# EAGLE board breakout (EAGLE 9.4.0)

Size 82.53 x 61.9 mm. Coordinates in mm from the lower left corner, seen from the top.
Outline: 0,0 82.53,0 82.53,61.9 0,61.9 0,0
Copper layers (1*16): Top 0.035mm / dielectric 1.5mm / Bottom 0.035mm
Design rules "default": minimum track width 6mil, minimum drill 0.35mm, track to track 6mil, track to pad 6mil, pad to pad 6mil, via to via 6mil, smd to smd 6mil, copper to edge 40mil, drill to drill 6mil, minimum pad ring 10mil, minimum via ring 8mil, stop-mask expansion 4mil, vias tented up to drill 0mil, thermal gap 10mil

## Footprints (pad centres in the part's own frame; a part is rotated, then mirrored left to right if it is on the bottom)
PANASONIC_D = smd 3 x 1.4: + 2.4,0; - -2.4,0
C0603 = smd 1.1 x 1: 1 -0.85,0; 2 0.85,0
PANASONIC_B = smd 2.2 x 1.4: + 1.6,0; - -1.6,0
WQP_PJ_301M6 = drill 1.016 pad 1.778 octagon: P1 0,-5.715; P2 0,-3.175; P3 0,4.445 | hole 2.2: 0,0
SOD123 = smd 1.4 x 1.4: A 1.9,0; C -1.9,0
SO14 = smd 0.6 x 2.2: 1 -3.81,-2.6; 2 -2.54,-2.6; 3 -1.27,-2.6; 4 0,-2.6; 5 1.27,-2.6; 6 2.54,-2.6; 7 3.81,-2.6; 8 3.81,2.6; 9 2.54,2.6; 10 1.27,2.6; 11 0,2.6; 12 -1.27,2.6; 13 -2.54,2.6; 14 -3.81,2.6
TO252 = smd 1 x 1.6: 1 -2.28,-4.8; 2 2.28,-4.8 | smd 5.4 x 6.2: 3 0,2.5
SO08 = smd 0.6 x 2.2: 1 -1.905,-2.6; 2 -0.635,-2.6; 3 0.635,-2.6; 4 1.905,-2.6; 5 1.905,2.6; 6 0.635,2.6; 7 -0.635,2.6; 8 -1.905,2.6
DBZ_R-PDSO-G3 = smd 0.7 x 1: 1 -0.95,-1.1; 2 0.95,-1.1; 3 0,1.1
AVR_ICSP = drill 1.016 pad 1.88 octagon: 1 -1.27,5.08; 2 1.27,5.08; 3 -1.27,2.54; 4 1.27,2.54; 5 -1.27,0; 6 1.27,0; 7 -1.27,-2.54; 8 1.27,-2.54; 9 -1.27,-5.08; 10 1.27,-5.08
SOT23-BEC = smd 1 x 1.4: B -0.95,-1.1; C 0,1.1; E 0.95,-1.1
R1206 = smd 1.6 x 1.803: 1 -1.422,0; 2 1.422,0
R0603 = smd 1 x 1.1: 1 -0.85,0; 2 0.85,0
BOURNS_PTV112 = drill 1 pad 1.6 octagon: 1 -3,-11; 1P -1,-11; 2 -5,-11; 2P 1,-11; 3 5,-11; 3P 3,-11 | drill 2.8 pad 3.81 octagon: P$1 5.8,0; P$5 -5.8,0
ALPS_POT_VERTICAL_PS = drill 1 pad 1.88 square: P$1 -2.5,7; P$2 0,7; P$3 2.5,7 | drill 1.5 pad 2.54 octagon: P$4 -4.7,0; P$5 4.7,0

## Placement (x,y rotation side)
C1  47u  [PANASONIC_D]  5.08,6.35 90 top
C2  47u  [PANASONIC_D]  13.97,24.13 270 top
C3  100n  [C0603]  11.43,30.48 0 top
C4  47u  [PANASONIC_D]  6.35,34.29 0 top
C10  1n  [C0603]  53.34,43.18 270 top
C13  47u  [PANASONIC_D]  27.94,6.35 270 top
C15  100n  [C0603]  78.74,35.56 0 top
C16  100n  [C0603]  38.1,20.32 180 top
C22  1n  [C0603]  66.04,41.91 270 top
C33  10u  [PANASONIC_B]  45.72,27.94 270 top
C36  10u  [PANASONIC_B]  -16.51,50.8 0 top  (outside the outline)
C37  10u  [PANASONIC_B]  5.08,41.91 180 top
C39  100n  [C0603]  30.48,33.02 0 top
C40  18p  [C0603]  43.18,34.29 270 top
C41  10u  [PANASONIC_B]  50.8,38.1 270 top
C42  18p  [C0603]  43.18,44.45 90 top
C43  220p  [C0603]  -16.51,41.91 0 top  (outside the outline)
C44  220p  [C0603]  11.43,40.64 0 top
C46  100n  [C0603]  36.83,33.02 0 top
CV_IN  PJ301_THONKICONN6  [WQP_PJ_301M6]  54.61,52.07 0 bottom
CV_IN_ATT  PJ301_THONKICONN6  [WQP_PJ_301M6]  64.77,52.07 0 bottom
D1  1N5819HW  [SOD123]  8.89,12.7 0 top
D2  1N5819HW  [SOD123]  25.4,12.7 0 top
IC1  OPAMP-TL074D  [SO14]  30.48,39.37 270 top
IC2  LM1117-3.3  [TO252]  6.35,24.13 0 top
IC3  MCP6002  [SO08]  59.69,41.91 90 top
IC6  LM4040B10  [DBZ_R-PDSO-G3]  38.1,24.13 0 top
IN_LEFT  PJ301_THONKICONN6  [WQP_PJ_301M6]  6.35,52.07 0 bottom
IN_RIGHT  PJ301_THONKICONN6  [WQP_PJ_301M6]  16.51,52.07 0 bottom
JP3  M05X2PTH  [AVR_ICSP]  16.51,6.35 90 top
OUT_LEFT  PJ301_THONKICONN6  [WQP_PJ_301M6]  40.64,52.07 0 bottom
OUT_RIGHT  PJ301_THONKICONN6  [WQP_PJ_301M6]  30.48,52.07 0 bottom
Q2  MMBT3904  [SOT23-BEC]  78.74,43.18 270 top
R11  4.7  [R1206]  11.43,16.51 180 top
R15  100k  [R0603]  78.74,48.26 270 top
R16  10k  [R0603]  78.74,39.37 180 top
R21  100k  [R0603]  50.8,52.07 90 top
R22  200k  [R0603]  48.26,44.45 270 top
R25  33k  [R0603]  50.8,44.45 90 top
R30  470  [R0603]  38.1,17.78 0 top
R31  66.5k  [R0603]  68.58,41.91 90 top
R32  100k  [R0603]  68.58,52.07 90 top
R33  200k  [R0603]  71.12,41.91 270 top
R42  PTV112-4420A-A503  [BOURNS_PTV112]  24.13,19.05 180 bottom
R43  10kB  [ALPS_POT_VERTICAL_PS]  66.04,20.32 0 top
R46  3.3k  [R0603]  19.05,43.18 90 top
R47  3.3k  [R0603]  24.13,41.91 90 top
R48  39k  [R0603]  45.72,44.45 270 top
R49  39k  [R0603]  45.72,34.29 90 top
R50  39k  [R0603]  45.72,39.37 270 top
R51  5.6k  [R0603]  48.26,34.29 270 top
R52  5.6k  [R0603]  43.18,39.37 270 top
R53  5.6k  [R0603]  -16.51,38.1 0 top  (outside the outline)
R54  5.6k  [R0603]  -16.51,33.02 0 top  (outside the outline)
R55  5.6k  [R0603]  11.43,38.1 0 top
R56  5.6k  [R0603]  11.43,43.18 180 top
R57  22k  [R0603]  19.05,46.99 90 top
R58  22k  [R0603]  22.86,52.07 90 top
R59  39k  [R0603]  50.8,31.75 90 top
R61  1.0k  [R0603]  45.72,52.07 270 top
R62  1.0k  [R0603]  36.83,46.99 270 top
TRG/GATE_IN  PJ301_THONKICONN6  [WQP_PJ_301M6]  74.93,52.07 0 bottom

## Library data of the parts
C1-C4 C10 C13 C15 C16 C22 C33 C36 C37 C39-C44 C46 R11 R15 R16 R21 R22 R25 R30-R33 R46-R59 R61 R62 = rcl
CV_IN CV_IN_ATT IN_LEFT IN_RIGHT OUT_LEFT OUT_RIGHT TRG/GATE_IN = og-pj301
D1 D2 = diode
IC1 = 0000-master
IC2 = og-vreg
IC3 = gm-ics
IC6 = texas
JP3 = og-header
Q2 = transistor
R42 R43 = og-pots

## Nets
+3V3: C3.1 C4.+ C15.1 IC2.3 IC3.8 R16.2
AREF_-10: C16.1 IC6.2 R22.2 R30.2 R43.P$3
DENSITY_CV: C22.2 IC3.1 R31.1
GND: C1.- C2.- C3.2 C4.- C13.+ C15.2 C16.2 C39.2 C43.2 C44.2 C46.1 CV_IN.P1 CV_IN_ATT.P1 IC1.3 IC1.5 IC1.10 IC1.12 IC2.1 IC3.3 IC3.4 IC3.5 IC6.1 IN_LEFT.P1 IN_RIGHT.P1 JP3.3 JP3.4 JP3.5 JP3.6 JP3.7 JP3.8 OUT_LEFT.P1 OUT_RIGHT.P1 Q2.E R43.P$1 R50.1 R54.1 R56.1 R59.1 TRG/GATE_IN.P1 TRG/GATE_IN.P2
LIN: C37.+
LOUT: C33.+
LOUT_JACK: OUT_LEFT.P3 R61.1
N$1: CV_IN.P3 R21.2
N$2: C10.1 IC3.6 R21.1 R22.1 R25.2
N$14: CV_IN_ATT.P3 R32.2
N$18: C37.- C44.1 R55.1 R56.2
N$20: IN_RIGHT.P3 R58.2
N$21: IN_LEFT.P3 IN_RIGHT.P2 R57.2
N$22: C36.- C43.1 R53.1 R54.2
N$23: C41.- R50.2 R52.2
N$24: C22.1 IC3.2 R31.2 R32.1 R33.1
N$25: C42.1 IC1.13 R48.2 R52.1
N$26: R33.2 R43.P$2
N$28: C42.2 IC1.14 R48.1 R62.2
N$31: C33.- R51.2 R59.2
N$32: C40.1 IC1.9 R49.2 R51.1
N$33: C40.2 IC1.8 R49.1 R61.2
N$36: R15.1 TRG/GATE_IN.P3
N$37: Q2.B R15.2
N$42: IC1.7 R42.2P R42.3P R53.2
N$51: IC1.1 R42.2 R42.3 R55.2
N$52: R42.1P R47.1
N$53: R42.1 R46.1
N$54: IC1.6 R47.2 R58.1
N$55: C2.+ IC2.2 R11.2
N$56: D1.A JP3.1 JP3.2
N$58: IC1.2 R46.2 R57.1
N$64: D2.C JP3.9 JP3.10
PLAY: Q2.C R16.1
RIN: C36.+
ROUT: C41.+
ROUT_JACK: OUT_RIGHT.P3 R62.1
SIZE_CV: C10.2 IC3.7 R25.1
VCC: C1.+ C39.1 D1.C IC1.4 R11.1
VEE: C13.- C46.2 D2.A IC1.11 R30.1

## Tracks (layer width: path | path; a pad name or v marks a point on that pad's centre or on a via)
+3V3  (5 unrouted)
AREF_-10  (4 unrouted)
DENSITY_CV  (2 unrouted)
GND  (39 unrouted)
LOUT_JACK  (1 unrouted)
N$1  (1 unrouted)
N$2  (4 unrouted)
N$14  (1 unrouted)
N$18  (3 unrouted)
N$20  (1 unrouted)
N$21  (2 unrouted)
N$22  (3 unrouted)
N$23  (2 unrouted)
N$24  (4 unrouted)
N$25  (3 unrouted)
N$26  (1 unrouted)
N$28  (3 unrouted)
N$31  (2 unrouted)
N$32  (3 unrouted)
N$33  (3 unrouted)
N$36  (1 unrouted)
N$37  (1 unrouted)
N$42  (3 unrouted)
N$51  (3 unrouted)
N$52  (1 unrouted)
N$53  (1 unrouted)
N$54  (2 unrouted)
N$55  (2 unrouted)
N$56  (2 unrouted)
N$58  (2 unrouted)
N$64  (2 unrouted)
PLAY  (1 unrouted)
ROUT_JACK  (1 unrouted)
SIZE_CV  (2 unrouted)
VCC  (4 unrouted)
VEE  (4 unrouted)